# Altium PCB FlightController_Top_5x5.PcbDoc (part 2 of 4)
Units mm, origin at the board's own origin, x right, y up, seen from the top; angles counter-clockwise.
Board outline 127 x 127 mm, 2 copper layers (Top Layer, Bottom Layer), stack 0.691 mm thick; 156 components, 161 nets, 860 pads, 483 vias.
Unrouted connection lines stored in the file: 9.
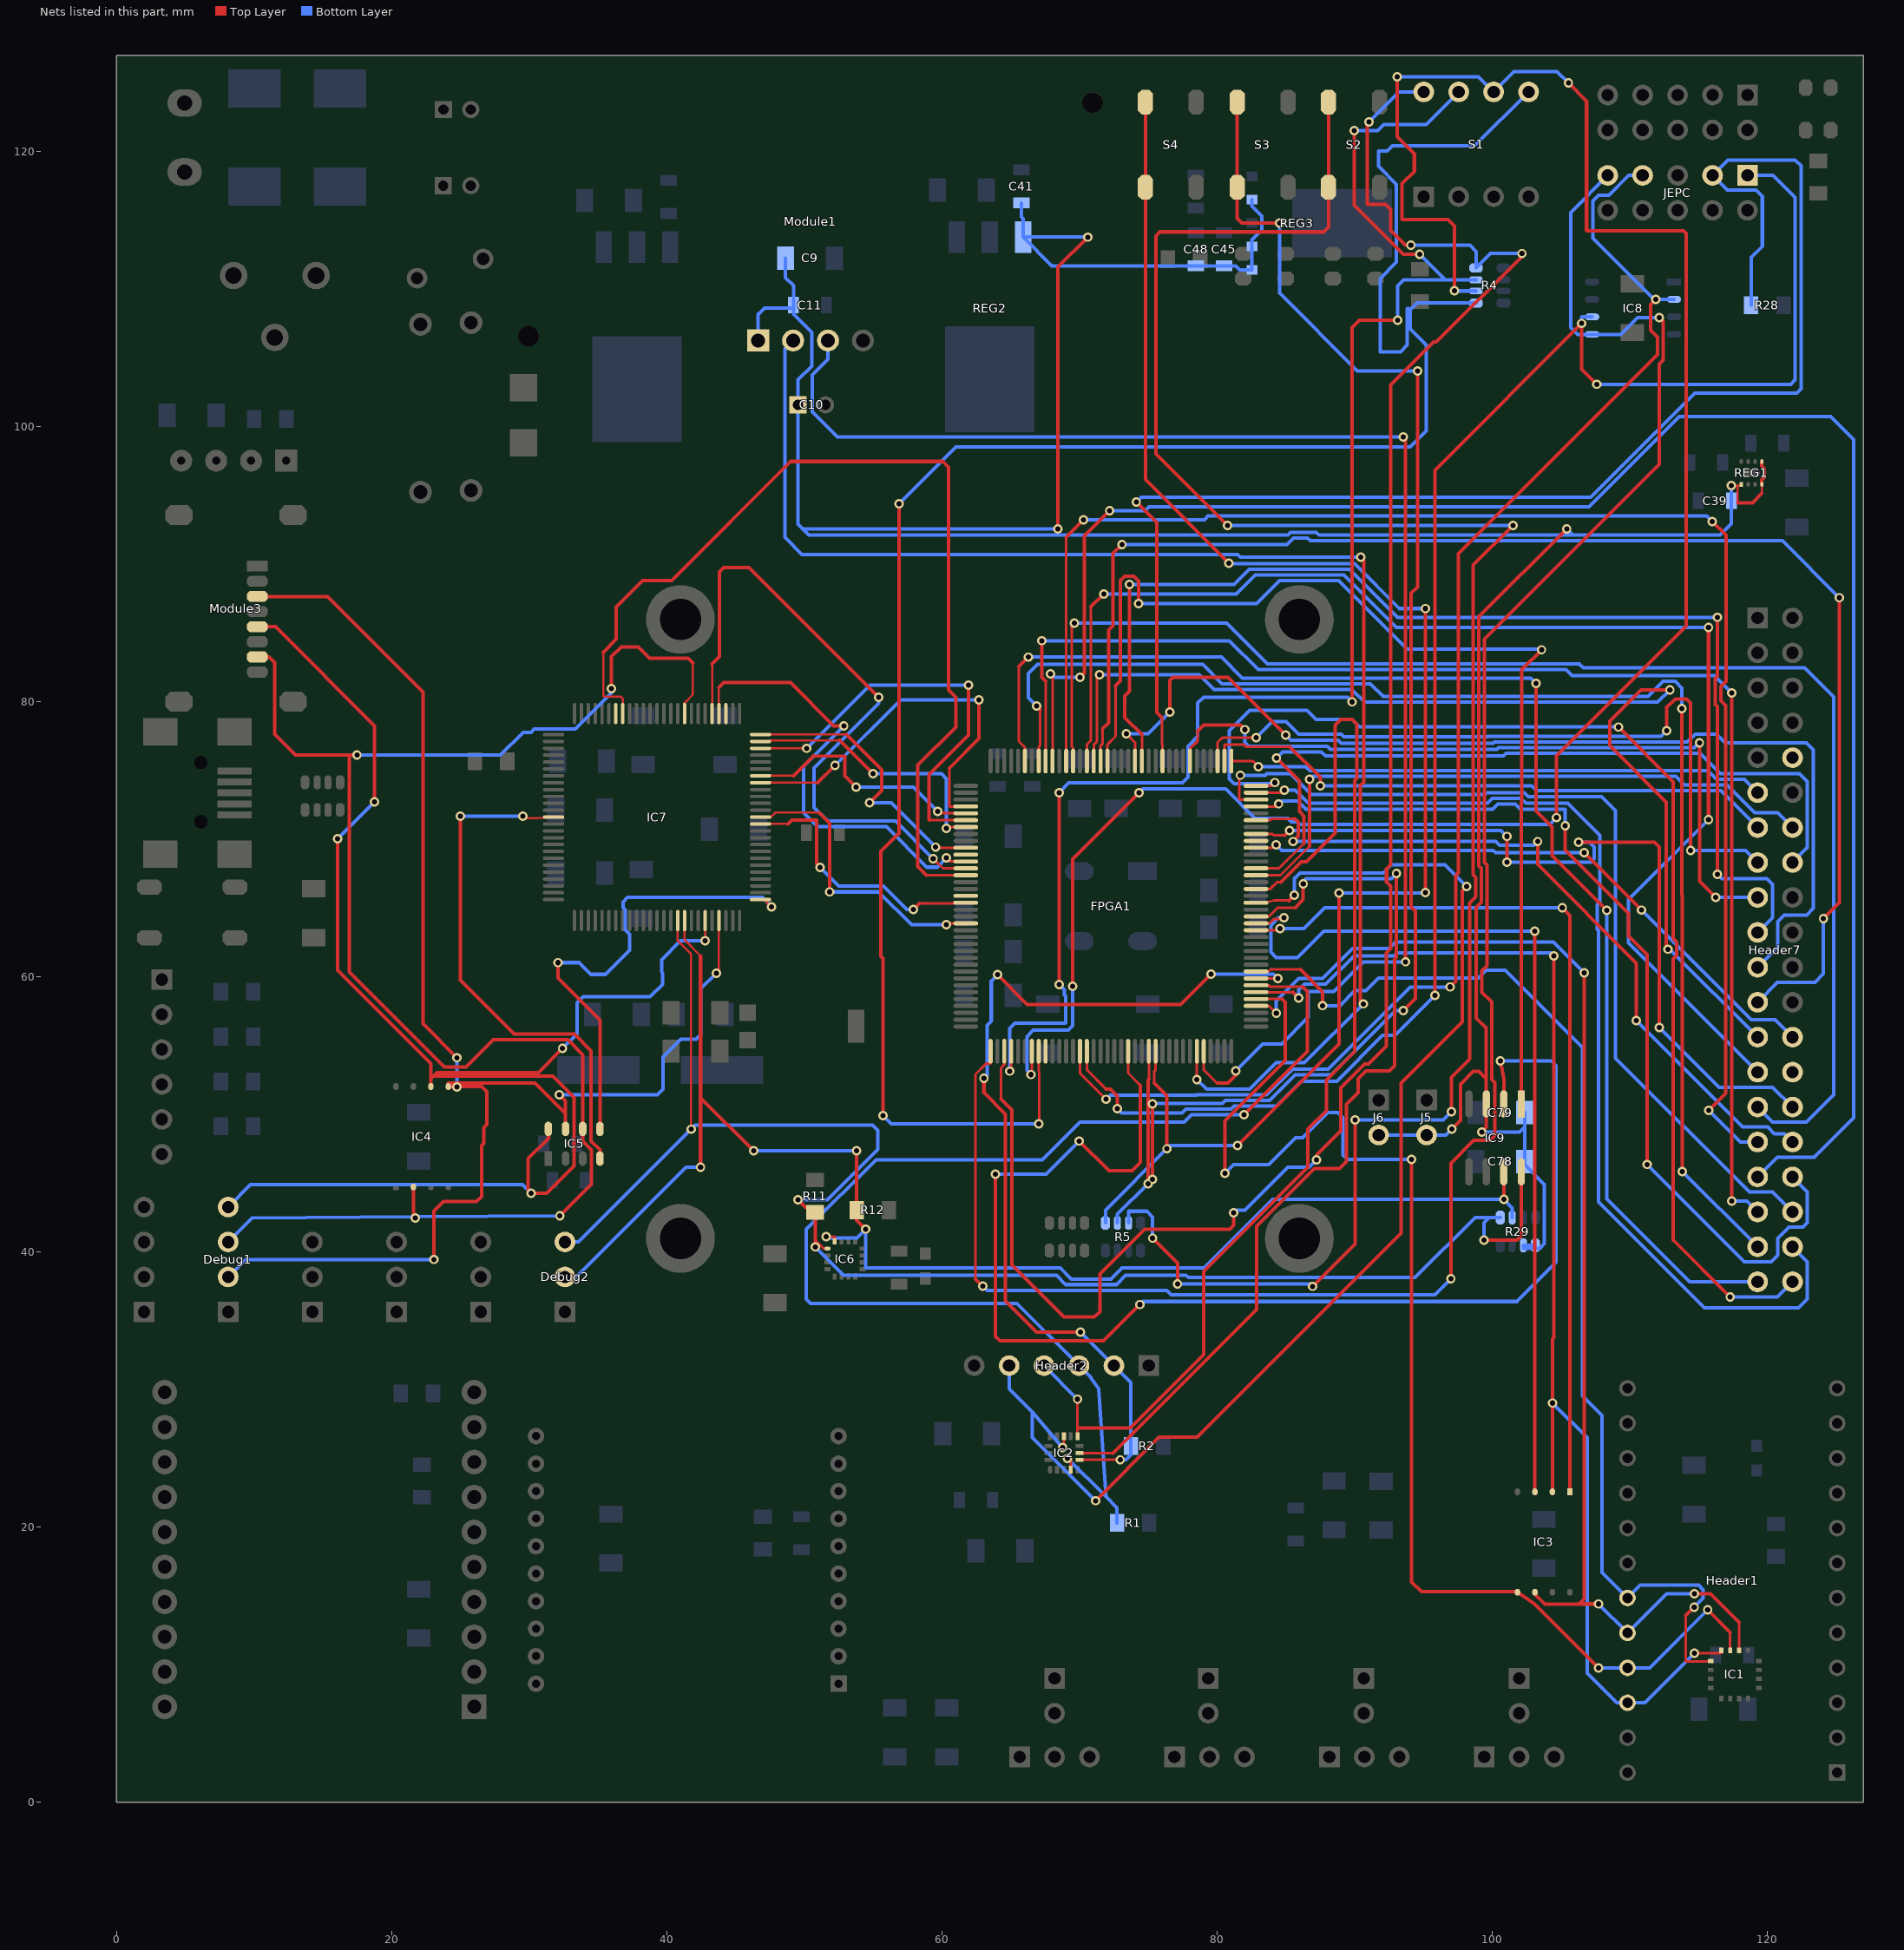
[diagram p2: the nets of this part, all layers, seen from the top]

## Via types
v1: diameter 0.686, hole 0.381, Top Layer to Bottom Layer, 483 vias

## Nets (pads, with @x,y where several pads share a name; then routed paths per layer and width w, separated by ;. In a path a pad name is that pad's centre, name@x,y a point inside that pad or via, vN(x,y) a via of type N, cw(c..) or ccw(c..) an arc to the next point about the centre after c; other vN are vias at no path point) (continued)
+5.0V: C9.2 C10.1 C11.1 C39.1 C41.1 C45.1 C48.1 C78.2 C79.2 Header7.10 IC9.3 J5.2 J6.2 Module1.1 R29.1 R29.2 REG1.1 REG1.4 REG1.5 REG2.3 REG3.1 REG3.2 REG3.4 | length 250.2
  Top Layer w0.158: v1(117.405,95.728) 117.885,95.728 ; 117.86,94.509 117.86,95.703 117.885,95.728 ; REG1.1@118.122,95.822 REG1.1@118.122,95.744 ; 119.622,95.157 REG1.4@119.622,95.822 ; 117.885,95.728 118.122,95.728 REG1.1@118.122,95.744 ; 117.885,95.728 117.901,95.744 REG1.1@118.122,95.744
  Top Layer w0.254: v1(68.448,92.578) 68.448,111.628 v1(70.607,113.787) ; v1(97.074,48.941) 97.709,49.576 97.709,52.212 98.631,53.134 99.048,53.134 99.57,52.612 ; v1(99.259,48.738) 99.591,49.07 IC9.3@99.591,50.775 99.591,52.105 99.57,52.126 99.57,52.612 ; v1(105.431,92.578) 99.049,86.196 99.049,68.08 99.225,67.904 99.225,65.436 98.862,65.073 98.862,57.009 99.57,56.3 99.57,52.612 ; 117.86,94.509 117.889,94.48 118.946,94.48 119.622,95.157 ; REG1.4@119.622,95.822 119.622,96.134 119.807,96.32 119.807,96.973 119.622,97.158 REG1.5@119.622,97.472
  Bottom Layer w0.254: Module1.1@46.651,106.275 46.651,108.174 47.108,108.631 C11.1@49.219,108.631 ; C9.2@48.644,112.268 48.644,110.832 49.219,110.257 C11.1@49.219,108.839 C11.1@49.219,108.631 ; C41.1@65.786,116.275 65.786,115.267 65.913,115.14 REG2.3@65.913,113.792 ; v1(68.448,92.578) 49.881,92.578 ; v1(70.607,113.787) 70.603,113.792 REG2.3@65.913,113.792 ; REG3.4@82.55,116.508 82.55,116.043 83.282,115.311 83.282,114.316 82.55,113.584 REG3.2@82.55,113.108 REG3.1@82.55,111.408 81.672,111.408 81.377,111.703 C45.1@80.518,111.703 C48.1@78.486,111.703 68.002,111.703 REG2.3@65.913,113.792 ; J6.2@91.767,48.514 J5.2@95.25,48.514 96.647,48.514 v1(97.074,48.941) ; v1(99.259,48.738) 102.001,48.738 102.382,49.119 ; C79.2@102.382,50.14 102.382,49.119 ; R29.1@103.152,40.504 R29.2@102.277,40.504 102.277,40.28 103.475,40.28 103.805,40.61 103.805,44.927 102.382,46.35 C78.2@102.382,46.584 102.382,49.119 ; v1(105.431,92.578) 105.89,92.119 ; v1(117.405,95.728) C39.1@117.405,94.615 117.405,92.945 116.58,92.119 105.89,92.119 ; C11.1@49.219,108.631 49.219,108.199 50.541,106.877 50.541,104.415 49.546,103.419 C10.1@49.546,101.6 49.546,92.913 49.881,92.578 ; 49.881,92.578 50.34,92.119 85.149,92.119 85.361,92.331 87.213,92.331 87.424,92.119 105.89,92.119
ACCEL_INT1: FPGA1.55 Header2.5 IC2.11 | length 91.9
  Top Layer w0.189: v1@68.875,25.898 IC2.11@68.875,26.616 ; FPGA1.55@82.848,65.401 83.637,65.451 84.151,65.558 85.245,65.558
  Top Layer w0.254: v1(68.779,25.802) v1@68.875,25.898 ; v1(71.179,21.928) 75.793,26.542 78.561,26.542 93.391,41.372 93.391,52.294 97.836,56.739 97.836,66.277 v1(98.154,66.594) ; 85.245,65.558 v1(85.644,65.957)
  Bottom Layer w0.254: Header2.5@64.897,31.75 64.897,30.069 66.594,28.372 ; v1(68.779,25.802) 66.594,28.372 ; v1(71.179,21.928) 66.594,26.513 66.594,28.372 ; v1(85.644,65.957) 85.644,67.166 86.05,67.571 92.093,67.571 92.68,68.158 96.59,68.158 v1(98.154,66.594)
ACCEL_INT2: FPGA1.57 Header2.4 IC2.9 | length 85.2
  Top Layer w0.189: IC2.9@69.875,26.616 69.875,27.173 ; v1(69.875,29.312) 69.875,27.173 ; 69.913,27.212 69.875,27.173 ; FPGA1.57@82.848,66.401 83.889,66.401 84.387,66.899 84.651,66.899
  Top Layer w0.254: 69.913,27.212 73.696,27.212 79.04,32.556 79.04,38.615 86.609,46.184 86.609,48.941 87.956,50.287 87.956,52.523 90.013,54.58 90.013,74.29 90.165,74.443 90.165,78.393 89.823,78.735 88.997,78.735 88.591,78.329 88.591,70.455 86.528,68.393 86.145,68.393 84.651,66.899
  Bottom Layer w0.254: Header2.4@67.437,31.75 v1(69.875,29.312)
ACCEL_SA0: FPGA1.53 IC2.7 | length 67.5
  Top Layer w0.189: IC2.7@70.009,25.4 72.462,25.4 ; FPGA1.53@82.848,64.401 83.79,64.401 84.434,65.045 85.695,65.045
  Top Layer w0.254: 72.462,25.4 82.876,35.814 82.876,41.874 87.073,46.071 88.906,46.071 89.414,46.579 89.414,50.745 90.267,51.597 90.267,52.599 90.851,53.183 92.528,53.183 92.909,53.564 92.909,61.286 93.061,61.438 v1(93.061,67.534) ; 85.695,65.045 86.279,65.629 v1(86.279,66.772)
  Bottom Layer w0.254: v1(86.279,66.772) 86.279,66.96 86.482,67.163 92.69,67.163 v1(93.061,67.534)
ACCEL_SCL: FPGA1.43 Header2.3 IC2.4 R1.1 | length 94.1
  Top Layer w0.189: IC2.4@69.375,24.184 v1@69.375,24.773 ; FPGA1.43@82.848,59.401 83.758,59.401 83.85,59.31 86.229,59.31
  Top Layer w0.254: v1(69.134,25.014) v1@69.375,24.773 ; v1(81.964,49.986) 86.577,54.599 86.577,58.962 86.229,59.31
  Bottom Layer w0.254: v1(69.134,25.014) 71.928,22.22 ; R1.1@72.739,20.32 72.739,21.41 71.928,22.22 ; v1(81.964,49.986) 78.162,49.986 77.625,49.449 70.056,49.449 67.312,46.706 55.215,46.706 50.16,41.651 50.16,36.571 50.465,36.267 65.46,36.267 Header2.3@69.977,31.75 70.834,30.893 71.408,30.077 71.928,22.22
ACCEL_SDA: FPGA1.44 Header2.2 IC2.6 R2.2 | length 69.4
  Top Layer w0.189: IC2.6@70.009,24.9 v1(72.97,24.9) ; FPGA1.44@82.848,59.901 v1(84.441,59.901)
  Top Layer w0.254: v1(63.064,52.64) 63.064,51.587 64.638,50.012 64.638,36.444 66.89,34.193 v1(70.074,34.193) ; v1(64.054,60.168) 66.213,58.009 77.364,58.009 v1(79.574,60.219)
  Bottom Layer w0.254: v1(63.064,52.64) 63.289,52.866 63.289,56.499 63.6,56.81 63.6,59.714 v1(64.054,60.168) ; v1(70.074,34.193) Header2.2@72.517,31.75 73.755,30.512 R2.2@73.755,25.908 73.755,25.256 73.399,24.9 v1(72.97,24.9) ; v1(79.574,60.219) 84.124,60.219 v1(84.441,59.901)
ASDO: FPGA1.1 IC8.5 JEPC.9 | length 150.1
  Top Layer w0.189: 62.454,38.045 62.454,52.929 63.225,53.7 63.548,53.7 FPGA1.1@63.548,54.601
  Top Layer w0.254: 62.454,38.045 v1(62.975,37.524) ; v1(97.009,38.056) 97.009,46.467 98.656,48.114 99.843,48.114 100.198,48.47 100.198,52.314 99.978,52.534 99.978,58.178 99.27,58.887 99.27,60.462 99.633,60.825 99.633,68.153 99.457,68.33 99.457,84.573 112.162,97.277 112.162,104.575 112.446,104.859 112.446,107.662 v1(112.162,107.945)
  Bottom Layer w0.254: v1(62.975,37.524) 63.292,37.206 76.363,37.206 76.682,36.887 95.841,36.887 v1(97.009,38.056) ; JEPC.9@108.415,118.28 105.72,115.585 105.72,107.222 106.219,106.723 IC8.5@107.283,106.723 109.366,106.723 110.589,107.945 v1(112.162,107.945)
BAROMETER_/CS: IC5.5 IC7.76 | length 35.6
  Top Layer w0.158: IC7.76@46.828,65.628 47.088,65.628 v1(47.62,65.096)
  Top Layer w0.254: v1(32.101,61.046) 32.101,59.914 35.149,56.866 IC5.5@35.149,48.954
  Bottom Layer w0.254: v1(32.101,61.046) 33.656,61.046 34.508,60.195 35.551,60.195 37.308,61.952 37.308,63.114 36.983,63.439 36.983,64.892 36.831,65.045 36.831,65.462 37.159,65.79 46.96,65.79 47.62,65.129 v1(47.62,65.096)
BAROMETER_/SHDN: IC5.4 IC7.38 | length 38.5
  Top Layer w0.158: v1@29.688,71.547 30.628,71.547 IC7.38@31.778,71.628
  Top Layer w0.254: v1(25.014,71.7) 25.014,59.762 28.926,55.85 33.292,55.85 34.514,54.628 34.514,48.078 35.149,47.443 IC5.4@35.149,46.804 ; v1(29.536,71.7) v1@29.688,71.547
  Bottom Layer w0.254: v1(25.014,71.7) v1(29.536,71.7)
BAROMETER_DIN: Debug1.2 IC4.5 IC5.7 IC7.72 Module3.3 | length 113.6
  Top Layer w0.158: v1@43.803,60.465 IC7.72@43.803,64.103
  Top Layer w0.252: v1(24.76,52.015) 24.13,52.015 IC4.5@24.13,52.037 ; 26.557,52.037 IC4.5@24.13,52.037 ; 30.425,52.294 24.13,52.294 IC4.5@24.13,52.037
  Top Layer w0.254: Module3.3@10.239,87.669 15.344,87.669 22.297,80.717 22.297,56.599 v1(24.76,54.136) ; v1(23.084,39.467) 23.084,42.985 23.783,43.683 26.183,43.683 26.538,44.039 26.538,47.744 26.694,47.9 26.694,49.04 26.935,49.281 26.935,51.659 26.557,52.037 ; 30.425,52.294 32.649,50.07 ; v1(32.203,51.43) 32.649,50.984 32.649,50.07 ; IC5.7@32.649,48.954 32.649,50.07 ; v1(43.607,60.27) v1@43.803,60.465
  Bottom Layer w0.254: Debug1.2@8.123,38.197 9.393,39.467 v1(23.084,39.467) ; v1(24.76,52.015) v1(24.76,54.136) ; v1(32.203,51.43) 39.34,51.43 39.746,51.837 39.746,54.199 41.016,55.469 42.147,55.469 42.464,55.787 42.464,59.127 v1(43.607,60.27)
BAROMETER_DOUT: Debug1.3 IC4.2 IC5.6 IC7.9 Module3.7 | length 123.9
  Top Layer w0.158: IC7.9@41.303,79.153 41.303,79.936 41.905,80.539 41.905,82.83
  Top Layer w0.252: v1@21.59,42.625 IC4.2@21.59,44.737
  Top Layer w0.254: Module3.7@10.239,83.269 11.083,83.269 11.502,82.85 11.502,77.643 13.013,76.132 16.937,76.132 ; v1(17.483,76.132) 16.937,76.132 ; v1@21.59,42.625 v1(21.725,42.49) ; v1(32.241,42.629) 34.539,44.928 34.539,47.437 33.899,48.078 IC5.6@33.899,48.954 33.899,54.354 32.82,55.433 27.391,55.433 25.425,53.467 23.853,53.467 16.937,60.382 16.937,76.132 ; v1(35.986,80.971) 35.986,83.295 36.698,84.008 37.932,84.008 38.766,83.173 41.563,83.173 41.905,82.83
  Bottom Layer w0.254: Debug1.3@8.123,40.737 9.876,42.49 v1@21.651,42.563 ; v1(17.483,76.132) 27.91,76.132 29.565,77.787 30.137,77.787 30.377,78.027 33.349,78.027 35.986,80.664 v1(35.986,80.971) ; v1(21.725,42.49) v1@21.651,42.563 ; v1(32.241,42.629) 21.725,42.564 v1@21.651,42.563
BAROMETER_SCLK: Debug1.4 IC4.6 IC5.8 IC7.70 Module3.5 | length 117.8
  Top Layer w0.158: v1(42.803,62.64) IC7.70@42.803,64.103
  Top Layer w0.252: IC4.6@22.86,52.037 22.86,52.612 22.86,53.712
  Top Layer w0.254: Module3.5@10.239,85.469 11.552,85.469 18.766,78.255 v1(18.766,72.741) ; v1(16.074,70.049) 16.074,60.498 22.86,53.712 ; 22.86,52.612 23.035,52.786 ; IC5.8@31.399,48.954 31.399,48.265 29.928,46.793 29.928,44.498 v1(30.145,44.28) 31.276,44.28 33.269,46.274 33.269,51.253 31.736,52.786 23.035,52.786 ; v1(32.431,54.809) 30.681,53.059 23.307,53.059 23.035,52.786
  Bottom Layer w0.254: Debug1.4@8.123,43.277 9.749,44.903 29.523,44.903 v1(30.145,44.28) ; v1(16.074,70.049) v1(18.766,72.741) ; v1(32.431,54.809) 33.482,55.859 33.482,58.127 33.917,58.562 38.804,58.562 39.71,59.469 39.71,60.278 39.63,60.358 39.63,61.26 41.011,62.64 v1(42.803,62.64)
BLED_BLUE1: FPGA1.69 Header7.34 | length 71.8
  Top Layer w0.189: FPGA1.69@82.848,72.401 84.298,72.401 v1(84.486,72.589)
  Top Layer w0.254: v1(105.329,70.988) 105.329,69.236 109.927,64.638 109.927,62.987 111.273,61.641 v1(111.273,46.376)
  Bottom Layer w0.254: v1(84.486,72.589) 84.703,72.806 85.873,72.806 86.47,72.209 100.057,72.209 100.438,72.59 101.686,72.59 102.067,72.209 105.304,72.209 105.329,72.184 v1(105.329,70.988) ; v1(111.273,46.376) 118.359,39.289 120.303,39.289 120.772,39.759 120.772,40.991 121.598,41.817 122.614,41.817 122.931,42.134 122.931,44.385 Header7.34@121.851,45.466
BLED_BLUE2: FPGA1.70 Header7.36 | length 67
  Top Layer w0.189: v1(81.707,74.671) 81.631,74.595 81.631,72.926 81.656,72.901 FPGA1.70@82.848,72.901
  Bottom Layer w0.254: v1(81.707,74.671) 83.511,74.671 83.612,74.773 85.365,74.773 86.863,73.274 99.49,73.274 99.622,73.406 102.346,73.406 102.631,73.122 107.971,73.122 108.987,72.106 108.987,54.097 118.715,44.369 120.408,44.369 Header7.36@121.851,42.926
BLED_BLUE3: FPGA1.71 Header7.38 | length 76.4
  Top Layer w0.189: FPGA1.71@82.848,73.401 v1@84.718,73.401
  Top Layer w0.254: v1@84.718,73.401 v1(84.905,73.589)
  Bottom Layer w0.254: v1(84.905,73.589) 85.688,73.589 86.648,72.629 99.661,72.629 100.03,72.998 102.094,72.998 102.463,72.629 105.516,72.629 107.847,70.298 107.847,65.466 107.655,65.273 107.655,63.454 107.733,63.376 107.733,43.655 115.435,35.953 122.288,35.953 122.931,36.597 122.931,39.305 Header7.38@121.851,40.386
BLED_BLUE4: FPGA1.72 Header7.40 | length 87.9
  Top Layer w0.189: FPGA1.72@82.848,73.901 83.985,73.901 v1(84.222,74.138)
  Top Layer w0.254: v1(109.19,78.177) 113.178,74.189 113.178,62.8 113.421,62.557 113.421,61.565 113.178,61.322 113.178,40.889 v1(117.318,36.749)
  Bottom Layer w0.254: v1(84.222,74.138) 84.131,74.047 81.25,74.047 80.894,74.403 80.894,77.897 82.39,79.393 86.533,79.393 87.202,78.724 89.823,78.724 90.37,78.177 v1(109.19,78.177) ; v1(117.318,36.749) 120.754,36.749 Header7.40@121.851,37.846
BLED_ORANGE1: FPGA1.63 Header7.26 | length 44.9
  Top Layer w0.189: FPGA1.63@82.848,69.401 84.082,69.401 v1(84.298,69.617)
  Top Layer w0.254: v1(106.714,69.033) v1(110.879,64.867)
  Bottom Layer w0.254: v1(84.298,69.617) 84.706,69.209 100.081,69.209 100.257,69.033 v1(106.714,69.033) ; v1(110.879,64.867) 118.855,56.891 120.585,56.891 Header7.26@121.851,55.626
BLED_ORANGE2: FPGA1.64 Header7.28
BLED_ORANGE3: FPGA1.65 Header7.30 | length 60.3
  Top Layer w0.189: FPGA1.65@82.848,70.401 84.044,70.401 84.142,70.303 84.933,70.303
  Top Layer w0.254: 84.933,70.303 v1(85.289,70.658) ; v1(101.087,68.347) v1(101.087,70.226) ; v1(106.294,69.795) 111.806,69.795 112.162,69.439 v1(112.162,56.333)
  Bottom Layer w0.254: v1(85.289,70.658) 100.656,70.658 v1(101.087,70.226) ; v1(101.087,68.347) 107.196,68.347 107.437,68.588 107.437,69.439 107.082,69.795 v1(106.294,69.795) ; v1(112.162,56.333) 116.505,51.989 120.408,51.989 Header7.30@121.851,50.546
BLED_ORANGE4: FPGA1.67 Header7.32 | length 53.8
  Top Layer w0.189: FPGA1.67@82.848,71.401 83.859,71.401 83.974,71.516 85.666,71.516
  Top Layer w0.254: v1(85.53,69.851) 85.914,70.235 85.914,71.268 85.666,71.516 ; v1(103.317,69.851) 103.317,68.177 110.485,61.009 v1(110.485,56.841)
  Bottom Layer w0.254: v1(85.53,69.851) 100.286,69.851 100.558,69.579 103.045,69.579 v1(103.317,69.851) ; v1(110.485,56.841) 118.232,49.094 120.036,49.094 120.518,48.611 121.246,48.611 Header7.32@121.851,48.006
BULTRASONIC_EDGE: FPGA1.60 Header7.16 | length 57.4
  Top Layer w0.189: FPGA1.60@82.848,67.901 84.52,67.901 86.322,69.703
  Top Layer w0.254: v1(84.326,75.931) 86,74.257 86,72.027 86.322,71.704 86.322,69.703
  Bottom Layer w0.254: v1(84.326,75.931) 84.77,76.376 87.604,76.376 87.893,76.086 100.85,76.086 101.024,76.261 115.119,76.261 116.604,74.776 122.357,74.776 122.931,74.202 122.931,69.407 Header7.16@121.851,68.326
BULTRASONIC_TRIGGER: FPGA1.59 Header7.14 | length 46.4
  Top Layer w0.189: FPGA1.59@82.848,67.401 84.622,67.401 86.73,69.509
  Top Layer w0.254: 86.73,69.509 v1(86.73,74.373)
  Bottom Layer w0.254: v1(86.73,74.373) 86.952,74.595 113.356,74.595 113.991,73.96 117.089,73.96 119.096,71.954 120.763,71.954 Header7.14@121.851,70.866
CAMERA_DCLK: FPGA1.92 Header7.23 | length 104
  Top Layer w0.189: FPGA1.92@71.548,75.701 71.548,76.819 71.7,76.971 71.7,78.058
  Top Layer w0.254: 71.7,78.058 72.13,78.489 72.13,85.211 72.462,85.543 72.462,90.813 v1(73.097,91.448) ; v1(124.1,64.257) 125.243,65.4 v1(125.243,87.575)
  Bottom Layer w0.254: v1(73.097,91.448) 85.082,91.448 85.557,91.923 86.593,91.923 86.805,91.711 121.106,91.711 v1(125.243,87.575) ; Header7.23@119.311,58.166 120.754,59.609 123.478,59.609 124.1,60.232 v1(124.1,64.257)
CAMERA_DOUT0: FPGA1.93 Header7.25 | length 81.9
  Top Layer w0.189: FPGA1.93@71.048,75.701 71.048,76.89 71.293,77.135 v1@71.293,81.809
  Top Layer w0.254: v1@71.293,81.809 v1(71.471,81.987) ; v1(112.797,62.022) 112.67,62.149 112.67,72.716 108.555,76.83 108.555,78.596 110.828,80.869 v1(112.937,80.869)
  Bottom Layer w0.254: v1(71.471,81.987) 78.735,81.987 79.804,80.918 89.811,80.918 90.751,79.978 112.046,79.978 v1(112.937,80.869) ; v1(112.797,62.022) 112.915,62.022 Header7.25@119.311,55.626
CAMERA_DOUT1: FPGA1.94 Header7.27 | length 97.4
  Top Layer w0.189: FPGA1.94@70.548,75.701 70.548,76.907 70.844,77.203 70.844,86.922
  Top Layer w0.254: 70.844,86.922 v1(71.776,87.854) ; v1(115.743,71.446) v1(115.743,85.416)
  Bottom Layer w0.254: v1(71.776,87.854) 81.418,87.854 82.799,89.235 89.221,89.235 93.04,85.416 v1(115.743,85.416) ; v1(115.743,71.446) 109.927,65.629 109.927,62.47 Header7.27@119.311,53.086
CAMERA_DOUT2: FPGA1.96 Header7.29 | length 103.3
  Top Layer w0.189: v1@69.457,85.535 69.457,76.743 69.548,76.653 FPGA1.96@69.548,75.701
  Top Layer w0.254: v1@69.457,85.535 v1(69.642,85.72)
  Bottom Layer w0.254: v1(69.642,85.72) 80.709,85.72 83.671,82.758 106.342,82.758 106.631,82.469 122.731,82.469 124.838,80.362 124.838,51.445 122.843,49.449 120.408,49.449 Header7.29@119.311,50.546
CAMERA_DOUT3: FPGA1.97 Header7.31 | length 112.6
  Top Layer w0.189: FPGA1.97@69.048,75.701 69.048,91.984
  Top Layer w0.254: 69.048,91.984 v1(70.303,93.239) ; v1(115.769,50.313) 117.002,51.546 117.002,79.723 116.643,80.082 116.643,81.134 117.013,81.504 117.013,92.121 v1(116.023,93.112)
  Bottom Layer w0.254: v1(70.303,93.239) 79.091,93.239 79.37,93.518 115.616,93.518 v1(116.023,93.112) ; v1(115.769,50.313) 118.075,48.006 Header7.31@119.311,48.006
CAMERA_DOUT4: FPGA1.99 Header7.33 | length 137.4
  Top Layer w0.189: FPGA1.99@68.048,75.701 v1@68.048,81.904
  Top Layer w0.254: v1(67.915,82.037) v1@68.048,81.904 ; v1(70.049,81.783) 70.379,82.114 70.379,92.07 v1(72.208,93.899)
  Bottom Layer w0.254: v1(67.915,82.037) 68.169,81.783 v1(70.049,81.783) ; v1(72.208,93.899) 74.773,93.899 75.052,94.179 107.049,94.179 113.628,100.757 124.633,100.757 126.31,99.081 126.31,49.779 123.439,46.909 120.754,46.909 Header7.33@119.311,45.466
CAMERA_DOUT5: FPGA1.100 Header7.35 | length 99.7
  Top Layer w0.189: FPGA1.100@67.548,75.701 67.548,81.517
  Top Layer w0.254: v1(67.28,84.45) 67.28,81.785 67.548,81.517 ; v1(117.42,43.709) v1(117.42,80.64)
  Bottom Layer w0.254: v1(67.28,84.45) 80.894,84.45 83.003,82.342 105.38,82.342 105.821,81.901 116.159,81.901 v1(117.42,80.64) ; v1(117.42,43.709) 118.528,43.709 Header7.35@119.311,42.926
CAMERA_DOUT6: FPGA1.101 Header7.37 | length 99.1
  Top Layer w0.189: FPGA1.101@67.048,75.701 67.048,76.725 67.153,76.83 67.153,79.447
  Top Layer w0.254: v1(66.899,79.701) 67.153,79.447 ; v1(113.813,79.523) 113.813,65.985 113.838,65.959 v1(113.838,45.859)
  Bottom Layer w0.254: v1(66.899,79.701) 66.289,80.31 66.289,82.063 66.95,82.723 78.964,82.723 80.361,81.326 91.156,81.326 92.096,80.386 111.352,80.386 112.458,81.493 113.318,81.493 113.813,80.998 v1(113.813,79.523) ; v1(113.838,45.859) Header7.37@119.311,40.386
CAMERA_DOUT7: FPGA1.103 Header7.39 | length 98.8
  Top Layer w0.189: 65.604,82.571 65.604,77.135 66.048,76.691 FPGA1.103@66.048,75.701
  Top Layer w0.254: 65.604,82.571 v1(66.289,83.257) ; v1(103.196,81.352) 103.196,72.081 104.364,70.912 104.364,68.829 v1(108.352,64.842)
  Bottom Layer w0.254: v1(66.289,83.257) 80.336,83.257 81.858,81.734 102.813,81.734 v1(103.196,81.352) ; v1(108.352,64.842) 108.352,43.861 114.367,37.846 Header7.39@119.311,37.846
CAMERA_EXTCLK: FPGA1.79 Header7.17 | length 55.3
  Top Layer w0.189: FPGA1.79@78.048,75.701 78.048,76.611 78.61,77.173 78.61,77.886
  Top Layer w0.254: 78.61,77.886 79.028,78.304 81.726,78.304 v1(82.044,77.986) ; v1(115.083,77.034) 115.083,66.963 v1(116.259,65.786)
  Bottom Layer w0.254: v1(82.044,77.986) 82.044,77.059 82.319,76.784 88.027,76.784 88.26,76.551 100.357,76.551 100.475,76.669 114.718,76.669 v1(115.083,77.034) ; v1(116.259,65.786) Header7.17@119.311,65.786
CAMERA_HD: FPGA1.86 Header7.19 | length 85.2
  Top Layer w0.189: FPGA1.86@74.548,75.701 74.548,77.614
  Top Layer w0.254: v1(73.643,88.527) 73.643,80.786 73.3,80.443 73.3,78.862 74.548,77.614 ; v1(116.378,67.471) 116.378,79.672 116.235,79.815 116.235,81.736 116.378,81.879 v1(116.378,86.152)
  Bottom Layer w0.254: v1(73.643,88.527) 81.241,88.527 82.357,89.643 89.643,89.643 93.134,86.152 v1(116.378,86.152) ; v1(116.378,67.471) 116.696,67.153 119.985,67.153 120.391,66.747 120.391,64.327 Header7.19@119.311,63.246
CAMERA_RESET: FPGA1.75 Header7.15 | length 55
  Top Layer w0.189: FPGA1.75@80.048,75.701 80.048,77.059 80.384,77.395 v1@82.831,77.395
  Top Layer w0.254: v1@82.831,77.395 v1(82.849,77.413) ; v1(112.709,77.911) 112.709,79.601 113.318,80.21 114.154,80.21 114.448,79.917 v1(114.448,69.196)
  Bottom Layer w0.254: v1(82.849,77.413) 84.013,78.577 85.035,78.577 85.962,77.65 89.051,77.65 89.236,77.465 99.639,77.465 99.659,77.485 112.283,77.485 v1(112.709,77.911) ; v1(114.448,69.196) 118.441,69.196 Header7.15@119.311,68.326
CAMERA_SCL: FPGA1.73 Header7.11 | length 39.2
  Top Layer w0.189: FPGA1.73@81.048,75.701 82.614,75.701 v1(83.014,75.301)
  Bottom Layer w0.254: v1(83.014,75.301) 86.465,75.301 86.764,75.003 115.693,75.003 116.327,74.368 118.349,74.368 Header7.11@119.311,73.406
CAMERA_SDA: FPGA1.74 Header7.13 | length 42.8
  Top Layer w0.189: FPGA1.74@80.548,75.701 80.548,76.881 80.573,76.907 81.961,76.907 82.114,76.754 85.289,76.754
  Top Layer w0.254: 85.289,76.754 87.524,74.519 v1(87.524,73.909)
  Bottom Layer w0.254: v1(87.524,73.909) 102.891,73.909 103.255,73.545 116.632,73.545 Header7.13@119.311,70.866
CAMERA_VD: FPGA1.87 Header7.21 | length 76.4
  Top Layer w0.189: v1(73.413,77.694) 74.048,77.059 FPGA1.87@74.048,75.701
  Top Layer w0.254: v1(76.576,79.269) 76.576,81.555 76.805,81.783 80.818,81.783 v1(85.009,77.592)
  Bottom Layer w0.254: v1(73.413,77.694) 75.002,77.694 v1(76.576,79.269) ; v1(85.009,77.592) 85.39,77.211 88.819,77.211 89.048,76.983 100.071,76.983 100.165,77.077 114.186,77.077 114.778,77.669 116.327,77.669 116.962,77.034 122.843,77.034 123.363,76.513 123.363,64.994 122.881,64.511 121.242,64.511 120.772,64.042 120.772,62.168 Header7.21@119.311,60.706
CLOCK_SYNTH_0: FPGA1.21 IC9.2 | length 97.8
  Top Layer w0.189: FPGA1.21@73.548,54.601 73.548,53.011 74.421,52.138
  Top Layer w0.254: v1(63.902,45.665) 63.902,33.879 64.232,33.549 71.75,33.549 v1(74.392,36.19) ; v1(69.998,48.078) 72.161,45.914 73.829,45.914 74.421,46.506 74.421,52.138 ; v1(100.605,53.894) 100.861,52.573 IC9.2@100.861,50.775
  Bottom Layer w0.254: v1(63.902,45.665) 67.585,45.665 v1(69.998,48.078) ; v1(74.392,36.19) 74.612,36.41 101.803,36.41 104.669,39.277 104.669,53.564 104.339,53.894 v1(100.605,53.894)
CLOCK_SYNTH_1: FPGA1.91 IC9.1 | length 82.5
  Top Layer w0.189: FPGA1.91@72.048,75.701 72.048,76.907 72.639,77.498 72.639,81.174
  Top Layer w0.254: 72.639,81.174 72.995,81.529 72.995,88.834 73.313,89.151 73.948,89.151 74.316,88.783 v1(74.316,87.143) ; IC9.1@102.131,50.775 102.131,72.716 102.154,72.739 102.154,82.342 v1(103.602,83.79)
  Bottom Layer w0.254: v1(74.316,87.143) 82.888,87.143 84.573,88.827 88.845,88.827 93.831,83.841 103.551,83.841 v1(103.602,83.79)
CONF_DONE: FPGA1.83 JEPC.3 R28.2 | length 107.1
  Top Layer w0.189: 76.018,78.862 76.018,76.907 76.048,76.877 FPGA1.83@76.048,75.701
  Top Layer w0.254: v1(74.138,94.534) 75.637,93.036 75.637,79.243 76.018,78.862
  Bottom Layer w0.254: v1(74.138,94.534) 74.494,94.89 107.183,94.89 114.753,102.459 122.157,102.459 122.474,102.777 122.474,118.969 122.042,119.401 117.157,119.401 JEPC.3@116.035,118.28 117.112,117.203 119.199,117.203 119.655,116.747 119.655,113.127 118.84,112.312 R28.2@118.84,108.839
CONFSWITCH_1: FPGA1.3 R4.4 S1.8 | length 145.3
  Top Layer w0.189: 64.308,51.111 64.308,53.386 64.548,53.626 FPGA1.3@64.548,54.601
  Top Layer w0.254: 64.308,51.111 65.096,50.324 65.096,39.061 68.88,35.276 71.09,35.276 71.496,35.682 71.496,38.4 74.748,41.651 80.933,41.651 81.218,41.937 v1(81.218,42.864) ; v1(87.244,46.706) 87.244,47.063 88.997,48.815 88.997,51.931 90.752,53.686 91.037,53.686 92.324,54.973 92.324,61.768 92.629,62.073 92.629,66.618 92.337,66.91 92.337,67.866 92.629,68.158 92.629,103.043 95.753,106.167 95.952,106.167 102.18,112.395 v1(102.18,112.594) ; v1(91.054,122.169) 90.927,122.042 90.927,116.2 90.953,116.175 92.248,116.175 92.629,115.794 92.629,114.27 93.696,113.203 v1(94.102,113.203)
  Bottom Layer w0.254: v1(81.218,42.864) 81.402,43.048 82.045,43.048 85.169,46.173 86.711,46.173 v1(87.244,46.706) ; v1(91.054,122.169) 93.231,124.346 S1.8@95.041,124.346 ; v1(94.102,113.203) 98.395,113.203 98.852,112.746 R4.4@98.852,111.554 ; R4.4@98.837,111.554 R4.4@98.852,111.554 ; v1(102.18,112.594) 99.892,112.594 R4.4@98.852,111.554
CONFSWITCH_2: FPGA1.4 R4.3 S1.7 | length 115
  Top Layer w0.189: v1(64.943,53.158) 65.048,53.262 FPGA1.4@65.048,54.601
  Top Layer w0.254: v1(68.525,59.457) v1(68.525,73.401) ; v1(89.835,80.005) 89.835,107.222 90.356,107.742 v1(93.137,107.742) ; v1(89.988,121.536) 89.988,116.107 93.551,112.543 v1(94.737,112.543)
  Bottom Layer w0.254: v1(64.943,53.158) 64.943,56.256 65.324,56.637 68.982,56.637 69.007,56.663 69.007,58.593 68.906,58.695 68.906,59.076 v1(68.525,59.457) ; v1(68.525,73.401) 69.236,74.113 77.491,74.113 77.897,74.519 77.897,76.78 78.608,77.491 78.608,79.917 79.028,80.336 89.505,80.336 v1(89.835,80.005) ; v1(89.988,121.536) 91.68,121.536 92.121,121.977 95.213,121.977 S1.7@97.581,124.346 ; v1(93.137,107.742) 93.137,110.247 93.569,110.679 96.602,110.679 ; v1(94.737,112.543) 96.602,110.679 ; R4.3@98.837,110.679 96.602,110.679
CONFSWITCH_3: FPGA1.7 R4.2 S1.6 | length 159.3
  Top Layer w0.189: v1(66.48,52.908) 66.548,52.976 FPGA1.7@66.548,54.601
  Top Layer w0.254: v1(69.515,59.33) 69.515,68.575 v1(74.341,73.401) ; v1(93.112,125.446) 93.112,121.077 94.356,119.833 94.356,118.583 93.46,117.687 93.46,115.108 93.491,115.078 96.808,115.078 97.277,114.608 v1(97.277,109.901) ; v1(104.694,71.585) 104.694,76.083 114.118,85.506 114.118,114.067 113.94,114.245 106.904,114.245 106.879,114.27 106.879,123.681 v1(105.558,125.002)
  Bottom Layer w0.254: v1(66.48,52.908) 66.188,53.2 66.188,55.672 66.645,56.129 69.185,56.129 69.515,56.46 v1(69.515,59.33) ; v1(74.341,73.401) 74.621,73.681 80.634,73.681 82.766,71.549 85.154,71.549 85.407,71.296 85.825,71.296 86.023,71.099 104.208,71.099 v1(104.694,71.585) ; v1(93.112,125.446) 99.021,125.446 S1.6@100.121,124.346 101.606,125.831 104.729,125.831 v1(105.558,125.002) ; v1(97.277,109.901) 97.3,109.879 R4.2@98.837,109.879
CONFSWITCH_4: FPGA1.8 R4.1 S1.5 | length 150.1
  Top Layer w0.189: FPGA1.8@67.048,54.601 67.048,53.137 67.071,53.114 v1@67.071,49.344
  Top Layer w0.254: v1(55.723,49.932) 55.723,61.362 55.572,61.513 55.572,69.128 56.891,70.448 v1(56.891,94.407) ; v1(67.048,49.32) v1@67.071,49.344
  Bottom Layer w0.254: v1(55.723,49.932) 56.335,49.32 v1(67.048,49.32) ; v1(56.891,94.407) 61.032,98.547 94.052,98.547 95.22,99.716 95.22,105.964 94.052,107.133 94.052,108.492 ; R4.1@98.837,109.004 94.564,109.004 94.052,108.492 ; S1.5@102.661,124.346 98.732,120.417 92.756,120.417 92.399,120.059 91.766,120.059 91.74,120.034 91.74,118.944 93.061,117.623 93.061,111.984 91.867,110.79 91.867,105.482 91.893,105.456 93.353,105.456 93.848,105.952 93.848,108.584 93.959,108.584 94.052,108.492
CONFSWITCH_5: FPGA1.9 R5.3 S2.2 | length 149.4
  Top Layer w0.254: v1(75.332,41.016) 77.135,39.213 v1(77.135,37.689) ; v1(80.767,92.832) 75.56,98.039 75.56,113.879 75.849,114.168 87.764,114.168 88.119,114.524 S2.2@88.119,117.403 S2.2@88.119,123.603 ; v1(86.965,37.511) 90.038,40.585 v1(90.038,49.602) ; v1(97.062,50.202) 97.062,52.717 98.387,54.043 98.387,65.391 98.817,65.821 98.817,67.254 98.641,67.43 98.641,89.95 v1(101.523,92.832)
  Bottom Layer w0.254: R5.3@73.575,42.123 73.575,42.947 73.6,42.972 74.9,42.972 75.332,42.54 v1(75.332,41.016) ; v1(77.135,37.689) 86.787,37.689 v1(86.965,37.511) ; v1(80.767,92.832) v1(101.523,92.832) ; v1(90.038,49.602) 96.461,49.602 v1(97.062,50.202)
CONFSWITCH_6: FPGA1.24 R5.2 S3.2 | length 116.7
  Top Layer w0.189: FPGA1.24@75.048,54.601 75.048,53.749 75.072,53.725 75.072,52.566
  Top Layer w0.254: v1(75.002,44.979) 75.002,52.495 75.072,52.566 ; v1(75.319,45.296) v1(75.319,50.783) ; S3.2@81.475,123.603 S3.2@81.475,117.403 81.475,115.159 81.831,114.803 v1(84.552,114.803) ; v1(93.544,57.552) 94.442,58.45 94.442,64.788 94.125,65.105 94.125,87.899 94.585,88.36 v1(94.585,104.059)
  Bottom Layer w0.254: R5.2@72.775,42.123 72.775,42.752 v1(75.002,44.979) v1(75.319,45.296) ; v1(75.319,50.783) 75.338,50.802 80.399,50.802 80.626,51.03 83.845,51.03 85.695,52.88 88.304,52.88 92.976,57.552 v1(93.544,57.552) ; v1(84.552,114.803) 84.552,109.723 90.216,104.059 v1(94.585,104.059)
CONFSWITCH_7: FPGA1.25 R5.1 S4.2 | length 120
  Top Layer w0.189: 75.457,52.294 75.457,53.168 75.548,53.259 FPGA1.25@75.548,54.601
  Top Layer w0.254: S4.2@74.801,123.614 S4.2@74.801,117.414 74.801,96.157 v1(80.869,90.089) ; 75.457,52.294 76.372,51.378 v1(76.372,47.518) ; v1(81.504,47.747) 88.886,55.129 v1(88.886,66.112) ; v1(95.157,66.137) v1(95.157,86.787)
  Bottom Layer w0.254: R5.1@71.9,42.123 71.9,43.045 v1(76.372,47.518) 76.602,47.747 v1(81.504,47.747) ; v1(80.869,90.089) 80.907,90.051 90.015,90.051 93.279,86.787 v1(95.157,86.787) ; v1(88.886,66.112) 95.131,66.112 v1(95.157,66.137)
DATAO: FPGA1.14 IC8.2 JEPC.7 | length 104.1
  Top Layer w0.189: FPGA1.14@70.048,54.601 70.048,53.005 v1(71.94,51.113)
  Top Layer w0.254: v1(96.96,59.279) 97.371,59.69 97.371,67.377 97.571,67.577 97.571,90.789 112.035,105.253 112.035,106.523 111.527,107.031 111.527,108.885 v1(111.904,109.263)
  Bottom Layer w0.254: v1(71.94,51.113) 72.249,51.421 78.511,51.421 78.527,51.438 83.621,51.438 85.493,53.31 88.083,53.31 94.052,59.279 v1(96.96,59.279) ; JEPC.7@110.955,118.28 109.939,118.28 108.494,116.835 107.742,116.835 107.336,116.429 107.336,113.711 111.784,109.263 v1(111.904,109.263) IC8.2@113.233,109.263
DCLK: FPGA1.15 IC8.6 JEPC.1 | length 123.4
  Top Layer w0.189: FPGA1.15@70.548,54.601 70.548,53.248 71.954,51.842
  Top Layer w0.254: 71.954,51.842 72.264,51.842 72.765,51.342 v1(72.765,50.427) ; v1(95.855,58.653) 95.855,96.846 v1(106.523,107.514) 106.523,104.186 v1(107.615,103.094)
  Bottom Layer w0.254: v1(72.765,50.427) 73.082,50.11 77.468,50.11 77.753,50.394 81.034,50.394 81.262,50.622 84.341,50.622 86.142,52.423 88.727,52.423 92.052,55.748 92.95,55.748 v1(95.855,58.653) ; v1(106.523,107.514) 106.523,107.967 106.548,107.993 IC8.6@107.283,107.993 ; v1(107.615,103.094) 121.725,103.094 122.042,103.412 122.042,116.679 120.442,118.28 JEPC.1@118.575,118.28
DS1085_SCL: Debug2.3 IC6.1 IC7.66 IC9.8 R11.1 R29.5 | length 118.6
  Top Layer w0.158: IC7.66@40.803,64.103 40.803,62.64 41.778,61.664 v1(41.778,48.936)
  Top Layer w0.189: 50.8,40.864 51.405,40.259 IC6.1@51.689,40.259
  Top Layer w0.254: v1(49.551,43.81) 50.11,43.252 50.8,43.252 R11.1@50.8,42.894 50.8,40.864 v1(50.8,40.381) ; v1(99.411,40.864) 101.813,40.864 102.131,41.182 IC9.8@102.131,45.845
  Bottom Layer w0.254: Debug2.3@32.609,40.737 33.58,40.737 v1(41.778,48.936) 42.063,49.221 54.986,49.221 55.342,48.865 55.342,47.468 51.684,43.81 v1(49.551,43.81) ; v1(50.8,40.381) 52.868,38.313 68.344,38.313 69.017,37.64 72.693,37.64 73.366,38.313 77.759,38.313 77.926,38.146 94.414,38.146 98.783,42.515 99.792,42.515 ; v1(99.411,40.864) 99.411,42.134 99.792,42.515 ; R29.5@100.602,42.504 100.602,42.515 99.792,42.515
DS1085_SDA: Debug2.2 IC6.16 IC7.67 IC9.7 R12.1 R29.6 | length 110.1
  Top Layer w0.158: IC7.67@41.303,64.103 41.303,62.701 42.464,61.54
  Top Layer w0.189: v1(51.608,41.118) 52.189,41.118 52.214,41.093 IC6.16@52.214,40.784
  Top Layer w0.254: v1(42.464,46.174) 42.464,51.227 ; 42.464,61.54 42.464,51.227 ; v1(46.325,47.366) 42.464,51.227 ; v1(53.816,47.366) R12.1@53.816,43.053 53.816,42.339 v1(54.478,41.677) ; v1(100.861,43.836) IC9.7@100.861,45.845
  Bottom Layer w0.254: Debug2.2@32.609,38.197 33.421,38.197 41.398,46.174 v1(42.464,46.174) ; v1(46.325,47.366) v1(53.816,47.366) ; v1(51.608,41.118) 51.684,41.042 53.843,41.042 v1(54.478,41.677) 54.478,38.857 68.615,38.857 69.425,38.048 72.285,38.048 73.095,38.857 79.066,38.857 84.044,43.836 v1(100.861,43.836) 101.477,43.22 R29.6@101.477,42.504
FPGA_A-/D: FPGA1.122 IC7.18 | length 72.3
  Top Layer w0.158: 35.399,83.607 35.399,80.445 35.451,80.393 36.644,80.393 36.803,80.234 IC7.18@36.803,79.153
  Top Layer w0.189: 58.898,67.401 FPGA1.122@61.748,67.401
  Top Layer w0.254: 35.399,83.607 36.343,84.551 36.343,86.906 38.256,88.819 40.356,88.819 49.017,97.481 60.079,97.481 60.498,97.062 60.498,80.87 61.017,80.351 61.017,78.162 58.265,75.41 58.265,68.034 58.898,67.401
FPGA_D0: FPGA1.112 IC7.93 | length 28.2
  Top Layer w0.158: IC7.93@46.828,74.128 50.98,74.128
  Top Layer w0.189: 60.549,75.179 60.549,72.426 60.574,72.401 FPGA1.112@61.748,72.401
  Top Layer w0.254: 50.98,74.128 v1(52.243,75.392) ; 60.549,75.179 62.695,77.325 v1(62.695,80.158)
  Bottom Layer w0.254: v1(52.243,75.392) 57.009,80.158 v1(62.695,80.158)
FPGA_D1: FPGA1.113 IC7.94 | length 18.1
  Top Layer w0.158: IC7.94@46.828,74.628 49.228,74.628
  Top Layer w0.189: v1@59.841,71.901 FPGA1.113@61.748,71.901
  Top Layer w0.254: 49.228,74.628 50.692,76.092 52.945,76.051 52.945,74.63 v1(53.767,73.808) ; v1(59.705,72.037) v1@59.841,71.901
  Bottom Layer w0.254: v1(53.767,73.808) 57.935,73.808 v1(59.705,72.037)
FPGA_D2: FPGA1.114 IC7.98 | length 30.7
  Top Layer w0.158: IC7.98@46.828,76.628 v1(50.187,76.628)
  Top Layer w0.189: 59.107,71.42 60.936,71.42 60.955,71.401 FPGA1.114@61.748,71.401
  Top Layer w0.254: 59.107,71.42 59.081,71.446 59.081,74.728 61.949,77.596 v1(61.949,81.225)
  Bottom Layer w0.254: v1(50.187,76.628) 54.783,81.225 v1(61.949,81.225)
FPGA_D3: FPGA1.115 IC7.99 | length 19.7
  Top Layer w0.158: IC7.99@46.828,77.128 47.478,77.128 47.561,77.211 52.573,77.211
  Top Layer w0.189: v1(60.346,70.811) 60.436,70.901 FPGA1.115@61.748,70.901
  Top Layer w0.254: 52.573,77.211 v1(55.012,74.773)
  Bottom Layer w0.254: v1(55.012,74.773) 59.978,74.773 60.346,74.405 v1(60.346,70.811)
FPGA_D4: FPGA1.118 IC7.100 | length 21
  Top Layer w0.158: IC7.100@46.828,77.628 53.089,77.628
  Top Layer w0.189: v1@59.596,69.401 FPGA1.118@61.748,69.401
  Top Layer w0.254: 53.089,77.628 55.636,75.082 55.636,73.555 v1(54.745,72.665) ; v1(59.558,69.439) v1@59.596,69.401
  Bottom Layer w0.254: v1(54.745,72.665) 56.333,72.665 v1(59.558,69.439)
FPGA_D5: FPGA1.119 IC7.3
FPGA_D6: FPGA1.120 IC7.4 | length 33.8
  Top Layer w0.158: IC7.4@43.803,79.153 43.803,81.065
  Top Layer w0.189: v1(60.344,68.67) 60.613,68.401 FPGA1.120@61.748,68.401
  Top Layer w0.254: 43.803,81.065 44.141,81.402 49.006,81.402 52.143,78.266 v1(52.878,78.266)
  Bottom Layer w0.254: v1(52.878,78.266) 49.949,75.336 49.949,71.961 50.98,70.929 55.987,70.929 58.93,67.986 59.66,67.986 v1(60.344,68.67)
FPGA_D7: FPGA1.121 IC7.5 | length 48.9
  Top Layer w0.158: IC7.5@43.303,79.153 43.303,82.765
  Top Layer w0.189: v1(59.371,68.61) 60.08,67.901 FPGA1.121@61.748,67.901
  Top Layer w0.254: 43.303,82.765 43.827,83.289 43.827,89.442 44.145,89.759 45.995,89.759 v1(55.418,80.336)
  Bottom Layer w0.254: v1(55.418,80.336) 55.418,79.891 50.719,75.192 50.719,72.334 51.716,71.337 56.644,71.337 v1(59.371,68.61)
FPGA_OK-IN: FPGA1.129 IC7.88 | length 21.4
  Top Layer w0.158: IC7.88@46.828,71.628 47.57,71.628 47.895,71.954 51.088,71.954
  Top Layer w0.189: v1(60.346,63.8) 60.447,63.901 FPGA1.129@61.748,63.901
  Top Layer w0.254: 51.088,71.954 51.838,71.203 v1(51.838,66.188)
  Bottom Layer w0.254: v1(51.838,66.188) 55.42,66.188 57.807,63.8 v1(60.346,63.8)
FPGA_OK-OUT: FPGA1.126 IC7.87 | length 19.8
  Top Layer w0.158: IC7.87@46.828,71.128 48.814,71.128
  Top Layer w0.189: 58.385,65.357 60.879,65.357 60.879,65.401 FPGA1.126@61.748,65.401
  Top Layer w0.254: 48.814,71.128 49.106,71.42 50.872,71.42 50.897,71.395 50.897,68.22 v1(51.151,67.965) ; v1(57.946,64.918) 58.385,65.357
  Bottom Layer w0.254: v1(51.151,67.965) 52.497,66.62 55.774,66.62 57.476,64.918 v1(57.946,64.918)
FPGA_R-/W: FPGA1.125 IC7.19
FPGA_SPI_/GYROCS: FPGA1.45 Header1.19 IC1.5 | length 83.8
  Top Layer w0.189: FPGA1.45@82.848,60.401 83.744,60.401 83.892,60.549 86.071,60.549 ; 114.092,13.584 114.092,10.257 115.625,10.232 IC1.5@115.893,10.274
  Top Layer w0.254: 86.071,60.549 87.689,58.932 v1(87.689,57.92) ; 114.092,13.584 v1(114.702,14.194)
  Bottom Layer w0.254: v1(87.689,57.92) 88.933,57.92 90.026,59.013 90.839,59.013 91.74,59.914 99.006,59.914 99.592,60.5 100.957,60.5 106.574,54.883 106.574,29.561 107.996,28.139 107.996,16.718 Header1.19@109.855,14.859 110.779,15.783 115.032,15.783 115.351,15.464 115.351,14.843 v1(114.702,14.194)
FPGA_SPI_/SRAMCS: FPGA1.51 IC3.1 | length 65.6
  Top Layer w0.189: FPGA1.51@82.848,63.401 84.47,63.401 v1(84.588,63.518)
  Top Layer w0.252: IC3.1@105.664,22.573 105.664,64.483
  Top Layer w0.254: v1(105.113,65.034) 105.664,64.483
  Bottom Layer w0.254: v1(84.588,63.518) 86.33,63.518 87.845,65.034 v1(105.113,65.034)
FPGA_SPI_CLOCK: FPGA1.40 Header1.20 IC1.2 IC3.6 | length 93.9
  Top Layer w0.189: FPGA1.40@82.848,57.901 83.796,57.901 v1(84.323,57.374) ; IC1.2@117.968,11.049 117.968,13.087
  Top Layer w0.252: IC3.6@103.124,15.273 103.124,15.129 103.831,14.423 106.333,14.423
  Top Layer w0.254: v1(106.701,60.314) 106.701,14.791 106.333,14.423 v1(107.751,14.423) ; v1(114.727,15.159) 115.895,15.159 117.968,13.087
  Bottom Layer w0.254: v1(84.323,57.374) 84.323,58.263 85.949,59.889 87.676,59.889 89.861,62.073 92.502,62.073 92.985,62.556 104.459,62.556 v1(106.701,60.314) ; v1(107.751,14.423) Header1.20@109.855,12.319 112.695,15.159 v1(114.727,15.159)
FPGA_SPI_DATAIN: FPGA1.41 Header1.21 IC1.3 IC3.5 | length 95
  Top Layer w0.189: FPGA1.41@82.848,58.401 84.73,58.401 ; IC1.3@117.318,11.049 117.318,12.353
  Top Layer w0.252: 94.864,15.312 101.854,15.312 IC3.5@101.854,15.273 103.099,14.417
  Top Layer w0.254: v1(80.59,45.722) 80.59,49.551 84.958,53.92 84.958,58.172 84.73,58.401 ; v1(94.153,46.731) 94.153,16.023 94.864,15.312 ; 103.099,14.417 v1(107.738,9.779) ; v1(115.68,13.991) 117.318,12.353
  Bottom Layer w0.254: v1(80.59,45.722) 81.225,46.357 83.758,46.357 85.72,48.318 86.235,48.318 88.063,50.147 88.782,50.147 89.175,49.754 89.175,47.062 89.505,46.731 v1(94.153,46.731) ; v1(107.738,9.779) Header1.21@109.855,9.779 111.468,9.779 v1(115.68,13.991)
FPGA_SPI_DATAOUT: FPGA1.42 Header1.22 IC1.4 IC3.2 | length 95.6
  Top Layer w0.189: FPGA1.42@82.848,58.901 85.527,58.901 ; v1(114.727,10.841) 116.668,10.841 IC1.4@116.668,11.049
  Top Layer w0.252: IC3.2@104.394,22.573 v1(104.394,29.028) 104.394,33.68
  Top Layer w0.254: 85.527,58.901 v1(85.949,58.479) ; 104.394,33.68 104.491,33.777 v1(104.491,61.54)
  Bottom Layer w0.254: v1(85.949,58.479) 85.949,59.06 86.368,59.479 87.918,59.479 89.978,61.54 92.88,61.54 93.097,61.757 104.273,61.757 v1(104.491,61.54) ; v1(104.394,29.028) 106.915,26.507 106.915,9.383 109.059,7.239 Header1.22@109.855,7.239 111.125,7.239 v1(114.727,10.841)
FPGASRAM_/WP: FPGA1.52 IC3.3 | length 66.3
  Top Layer w0.189: FPGA1.52@82.848,63.901 83.84,63.901 84.171,64.232 v1@84.806,64.232
  Top Layer w0.252: IC3.3@103.124,22.573 v1@103.124,63.338
  Top Layer w0.254: v1@84.806,64.232 v1(84.882,64.308) ; v1(103.119,63.343) v1@103.124,63.338
  Bottom Layer w0.254: v1(84.882,64.308) 84.476,64.308 83.917,63.749 83.917,61.819 84.323,61.413 85.847,61.413 87.777,63.343 v1(103.119,63.343)
FULTRASONIC_EDGE: FPGA1.32 Module1.3 | length 108.9
  Top Layer w0.189: FPGA1.32@79.048,54.601 79.048,53.251 80.005,52.294
  Top Layer w0.254: 80.005,52.294 80.814,52.294 81.377,52.857 v1(81.377,53.183) ; v1(93.544,99.259) 93.717,99.086 93.717,61.113 v1(93.721,61.108)
  Bottom Layer w0.254: Module1.3@51.731,106.275 51.731,104.919 50.592,103.78 50.592,101.087 52.421,99.259 v1(93.544,99.259) ; v1(81.377,53.183) 83.336,55.142 84.704,55.142 86.657,57.095 86.657,58.923 86.686,58.952 88.497,58.952 90.653,61.108 v1(93.721,61.108)
FULTRASONIC_TRIGGER: FPGA1.31 Module1.2 | length 106.8
  Top Layer w0.189: v1(78.548,52.548) FPGA1.31@78.548,54.601
  Top Layer w0.254: v1(90.47,90.523) 90.673,90.319 90.673,74.168 90.44,73.935 90.44,58.255 v1(90.648,58.047)
  Bottom Layer w0.254: Module1.2@49.191,106.275 48.586,105.67 48.586,91.982 49.839,90.728 81.502,90.728 81.707,90.523 v1(90.47,90.523) ; v1(78.548,52.548) 79.25,51.846 82.394,51.846 84.316,53.768 86.369,53.768 v1(90.648,58.047)